# Altium PCB PCB1.PcbDoc (part 1 of 2)
Units mm, origin at the board's own origin, x right, y up, seen from the top; angles counter-clockwise.
Board outline 101 x 100.58 mm, 2 copper layers (Top Layer, Bottom Layer); 195 components, 8 nets, 449 pads, 0 vias.
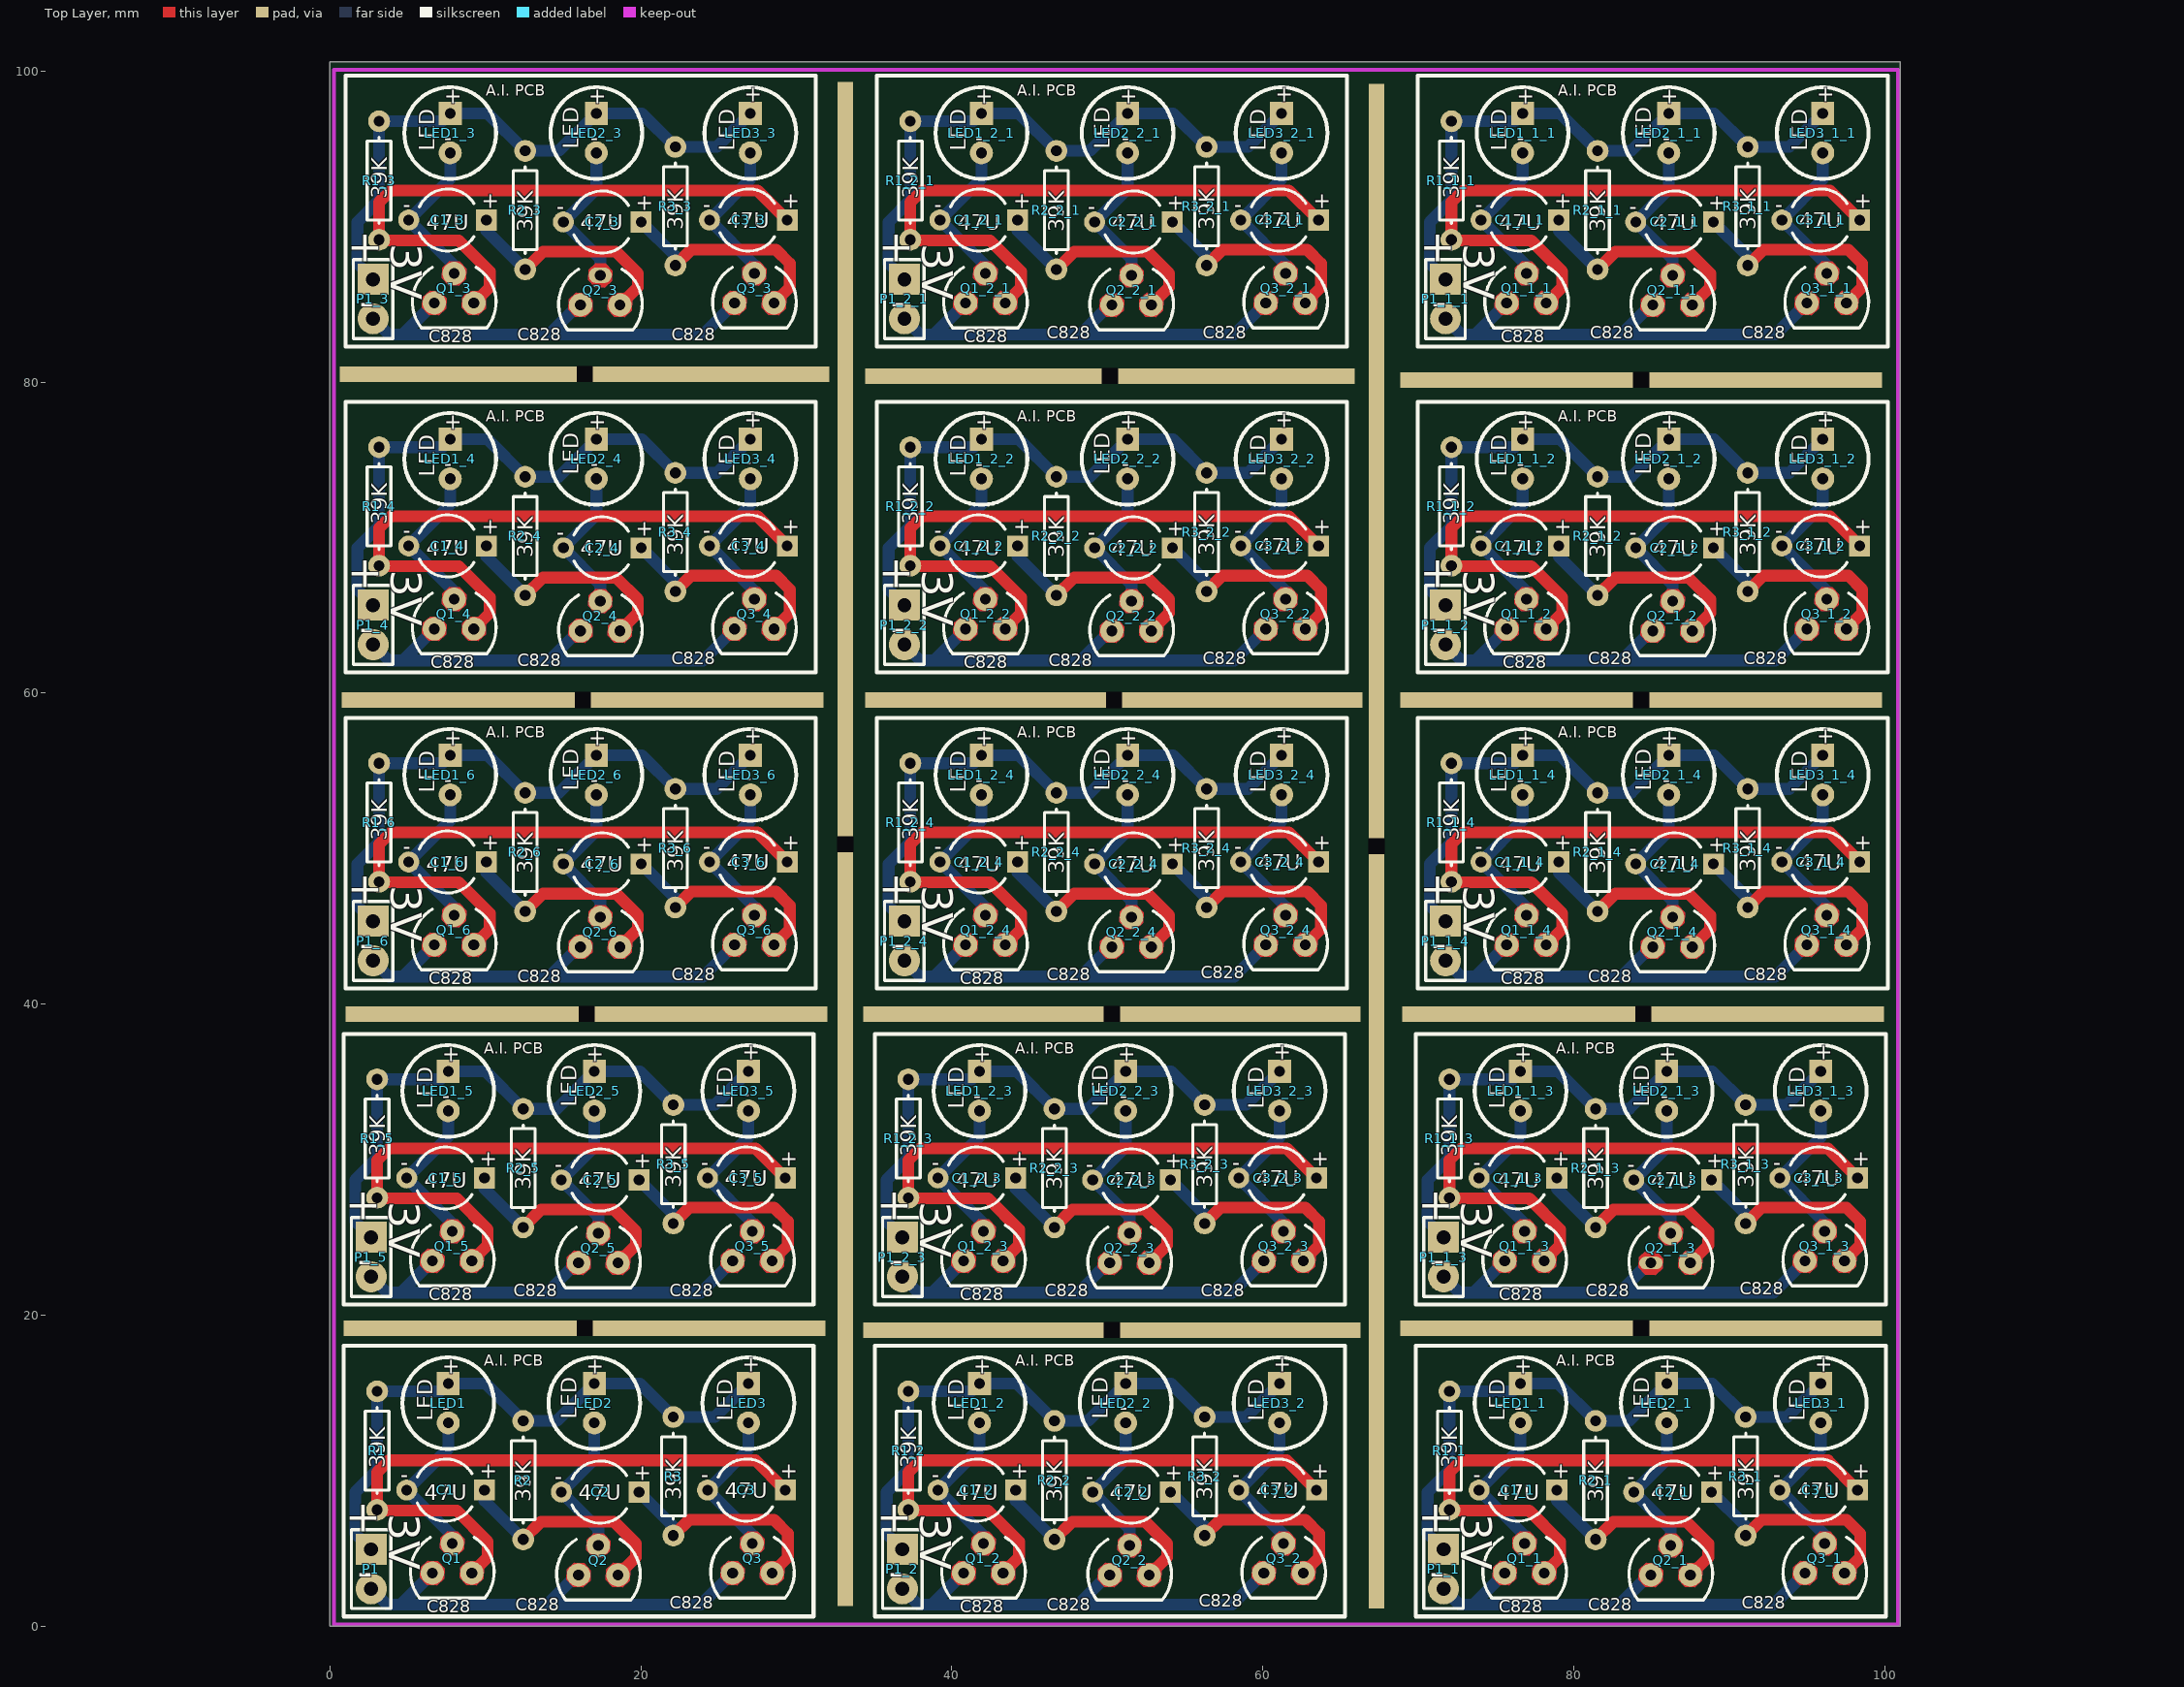
[diagram p0: Top Layer view]
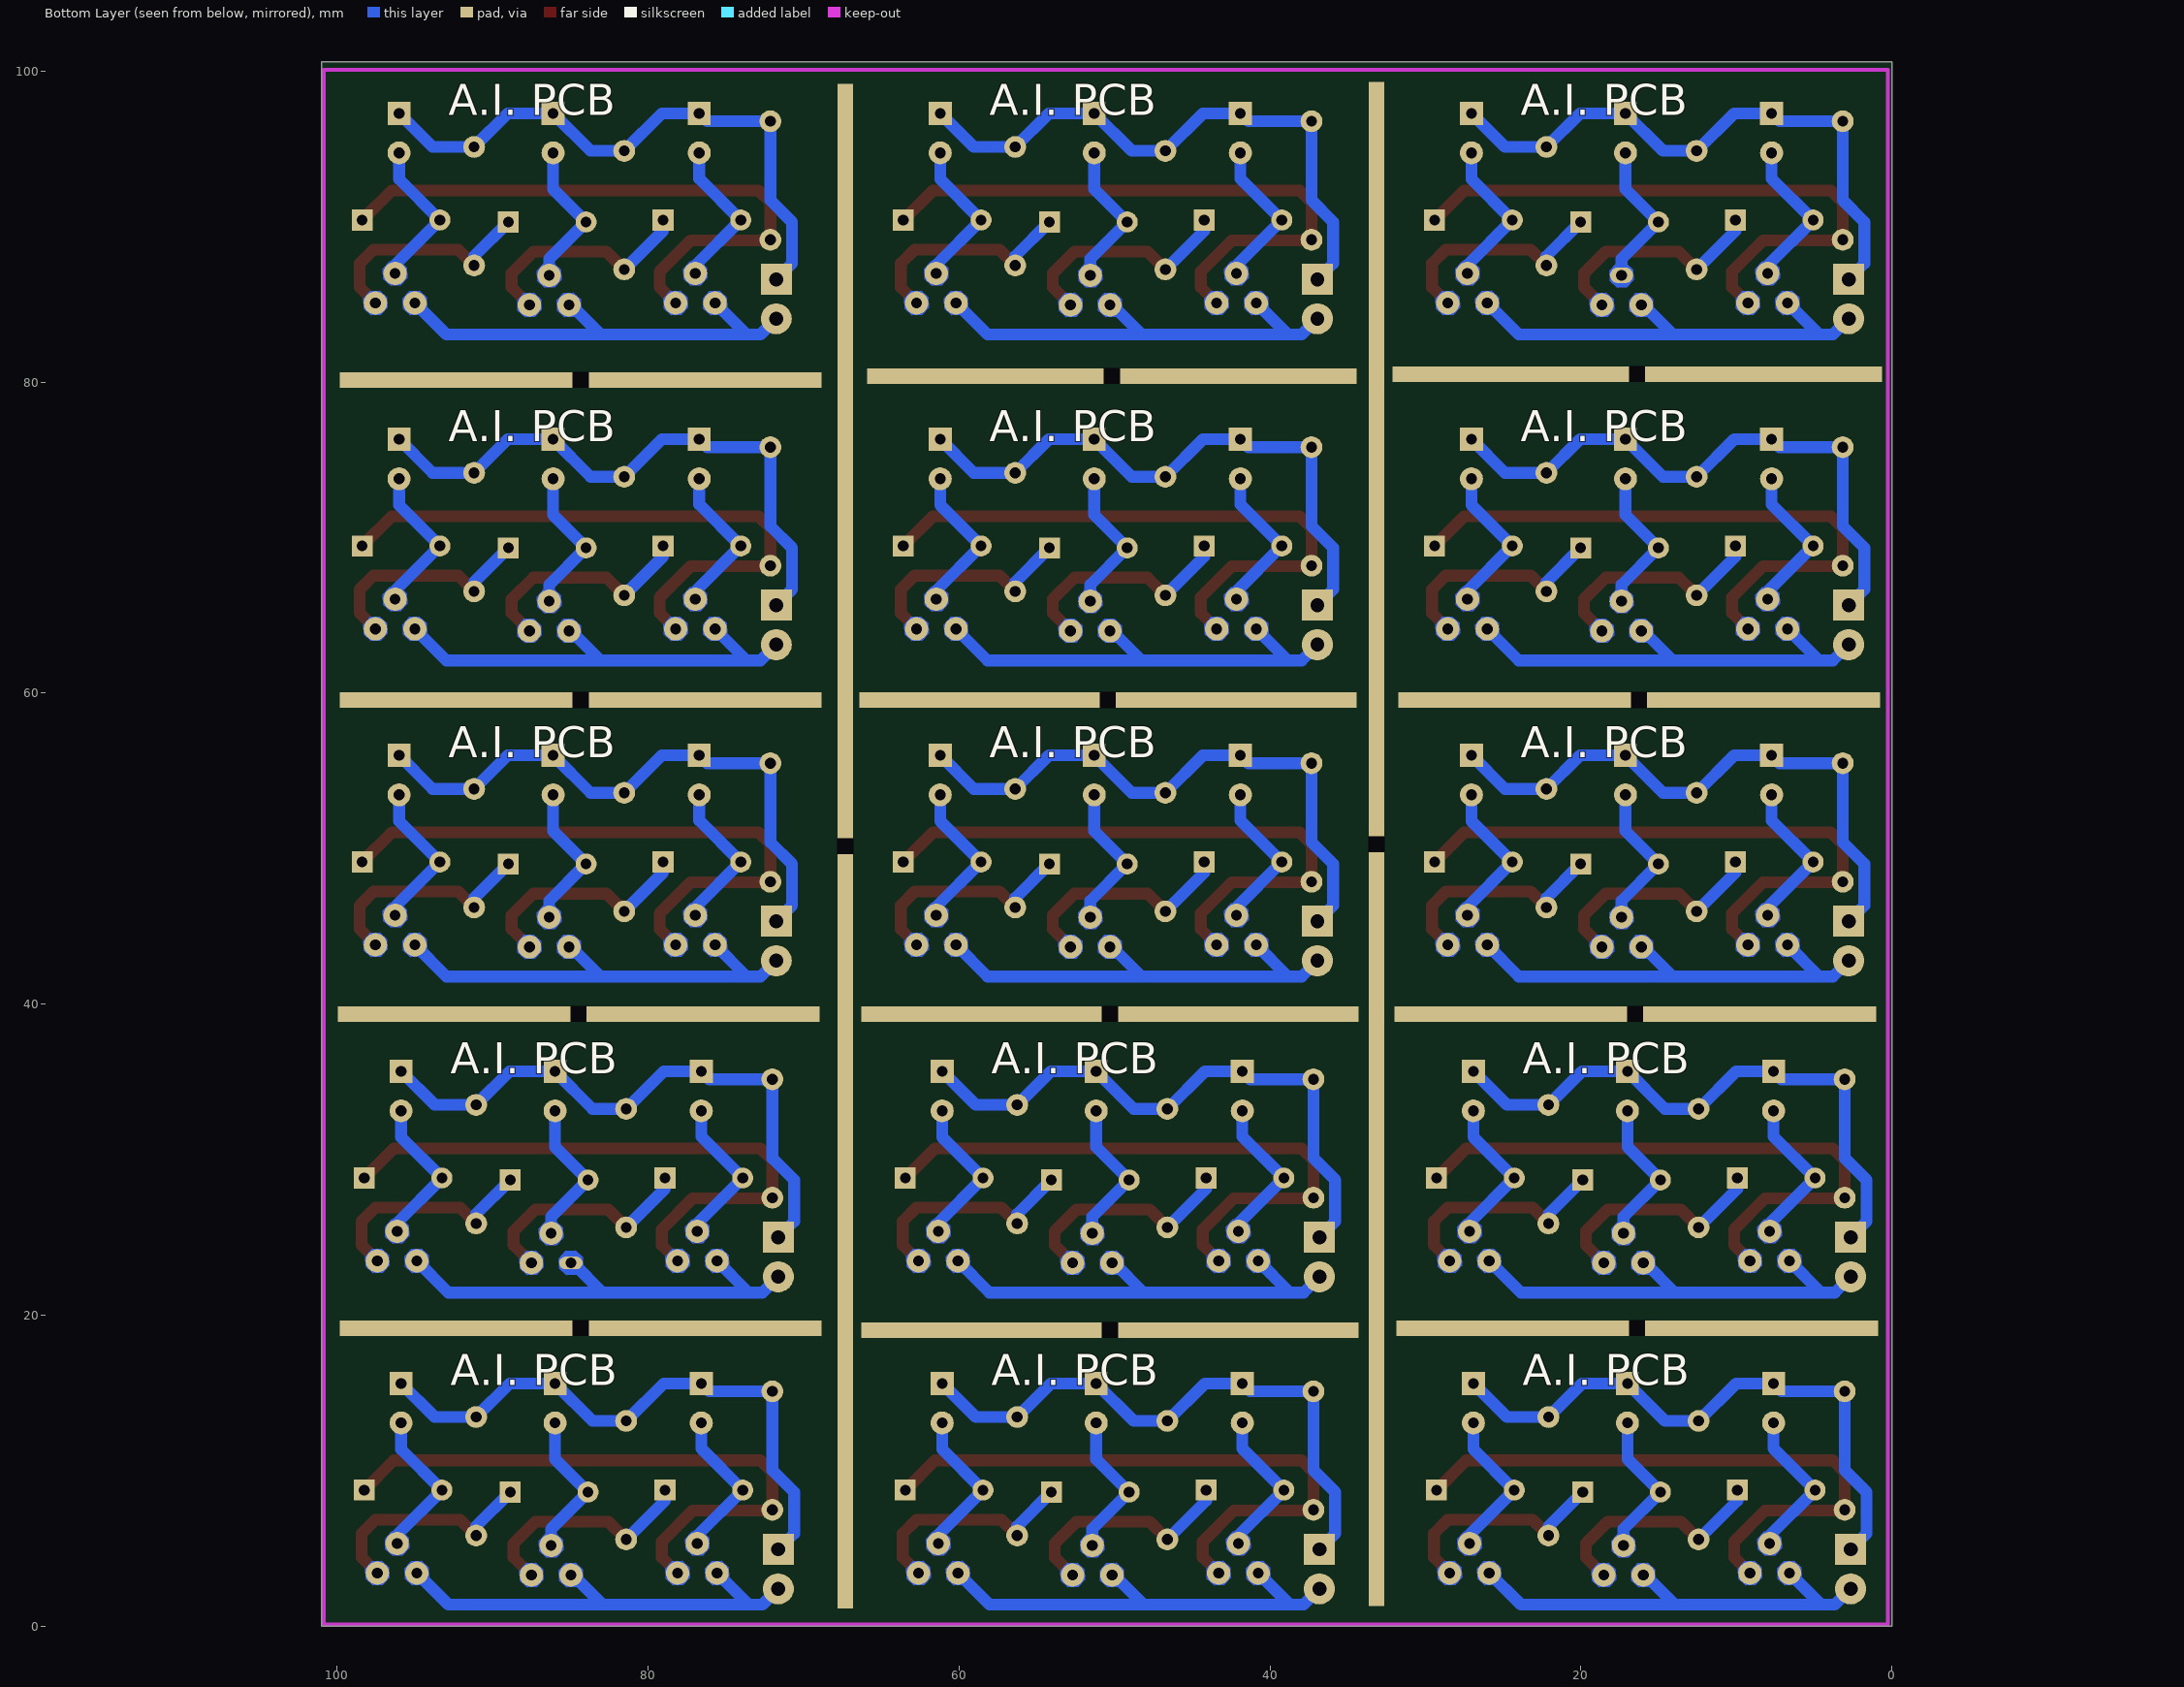
[diagram p1: Bottom Layer view, seen from below]

## Layer stack, top to bottom
Top Solder: solder mask 0.0102, Solder Resist, Dk 3.5
Top Layer: signal copper 0.0356
Dielectric 1: dielectric 0.32, FR-4, Dk 4.8
Bottom Layer: signal copper 0.0356
Bottom Solder: solder mask 0.0102, Solder Resist, Dk 3.5

## Board outline
0,0 0,100.584 101,100.584 101,0

## Design rules (kind name [scope] priority, off if disabled: settings)
Clearance [All] p1: gap=0.254 ignorepadtopadclearanceinfootprint=FALSE except(0: Arc-Hole Track-Hole SMDPad-Hole THPad-Hole Via-Hole Fill-Hole Poly-Hole Region-Hole Text-Hole)
PolygonConnect [All] p1: connectstyle=Relief reliefconductorwidth=0.254 reliefentries=4 polygonreliefangle="90 Angle" airgapwidth=0.254
RoutingVias [All] p1: holewidth=0.711 width=1.27 viastyle="Through Hole" minholewidth=0.711 minwidth=1.27 maxholewidth=0.711 maxwidth=1.27
SolderMaskExpansion [All] p1: expansion=0.102
Width [All] p1: maxlimit=0.762 minlimit=0.508 preferedwidth=0.762
30 further rules are at their usual default settings.

## Classes and differential pairs
component class Sheet1: C1 C2 C3 LED1 LED2 LED3 P1 Q1 Q2 Q3 R1 R2 R3

## Components (designator, comment, footprint, x,y, rotation, side; value= is the part's Value field where it differs from the comment)
C1 "Cap2" CAPR5-4X5 7.445,8.763 r180 top value=100pF
C1_1 "Cap2" CAPR5-4X5 76.406,8.763 r180 top value=100pF (schematic designator C1)
C1_1_1 "Cap2" CAPR5-4X5 76.533,90.424 r180 top value=100pF (schematic designator C1)
C1_1_2 "Cap2" CAPR5-4X5 76.533,69.469 r180 top value=100pF (schematic designator C1)
C1_1_3 "Cap2" CAPR5-4X5 76.406,28.829 r180 top value=100pF (schematic designator C1)
C1_1_4 "Cap2" CAPR5-4X5 76.533,49.149 r180 top value=100pF (schematic designator C1)
C1_2 "Cap2" CAPR5-4X5 41.608,8.763 r180 top value=100pF (schematic designator C1)
C1_2_1 "Cap2" CAPR5-4X5 41.735,90.424 r180 top value=100pF (schematic designator C1)
C1_2_2 "Cap2" CAPR5-4X5 41.735,69.469 r180 top value=100pF (schematic designator C1)
C1_2_3 "Cap2" CAPR5-4X5 41.608,28.829 r180 top value=100pF (schematic designator C1)
C1_2_4 "Cap2" CAPR5-4X5 41.735,49.149 r180 top value=100pF (schematic designator C1)
C1_3 "Cap2" CAPR5-4X5 7.572,90.424 r180 top value=100pF (schematic designator C1)
C1_4 "Cap2" CAPR5-4X5 7.572,69.469 r180 top value=100pF (schematic designator C1)
C1_5 "Cap2" CAPR5-4X5 7.445,28.829 r180 top value=100pF (schematic designator C1)
C1_6 "Cap2" CAPR5-4X5 7.572,49.149 r180 top value=100pF (schematic designator C1)
C2 "Cap2" CAPR5-4X5 17.391,8.636 r180 top value=100pF
C2_1 "Cap2" CAPR5-4X5 86.352,8.636 r180 top value=100pF (schematic designator C2)
C2_1_1 "Cap2" CAPR5-4X5 86.479,90.297 r180 top value=100pF (schematic designator C2)
C2_1_2 "Cap2" CAPR5-4X5 86.479,69.342 r180 top value=100pF (schematic designator C2)
C2_1_3 "Cap2" CAPR5-4X5 86.352,28.702 r180 top value=100pF (schematic designator C2)
C2_1_4 "Cap2" CAPR5-4X5 86.479,49.022 r180 top value=100pF (schematic designator C2)
C2_2 "Cap2" CAPR5-4X5 51.554,8.636 r180 top value=100pF (schematic designator C2)
C2_2_1 "Cap2" CAPR5-4X5 51.681,90.297 r180 top value=100pF (schematic designator C2)
C2_2_2 "Cap2" CAPR5-4X5 51.681,69.342 r180 top value=100pF (schematic designator C2)
C2_2_3 "Cap2" CAPR5-4X5 51.554,28.702 r180 top value=100pF (schematic designator C2)
C2_2_4 "Cap2" CAPR5-4X5 51.681,49.022 r180 top value=100pF (schematic designator C2)
C2_3 "Cap2" CAPR5-4X5 17.518,90.297 r180 top value=100pF (schematic designator C2)
C2_4 "Cap2" CAPR5-4X5 17.518,69.342 r180 top value=100pF (schematic designator C2)
C2_5 "Cap2" CAPR5-4X5 17.391,28.702 r180 top value=100pF (schematic designator C2)
C2_6 "Cap2" CAPR5-4X5 17.518,49.022 r180 top value=100pF (schematic designator C2)
C3 "Cap2" CAPR5-4X5 26.789,8.763 r180 top value=100pF
C3_1 "Cap2" CAPR5-4X5 95.75,8.763 r180 top value=100pF (schematic designator C3)
C3_1_1 "Cap2" CAPR5-4X5 95.877,90.424 r180 top value=100pF (schematic designator C3)
C3_1_2 "Cap2" CAPR5-4X5 95.877,69.469 r180 top value=100pF (schematic designator C3)
C3_1_3 "Cap2" CAPR5-4X5 95.75,28.829 r180 top value=100pF (schematic designator C3)
C3_1_4 "Cap2" CAPR5-4X5 95.877,49.149 r180 top value=100pF (schematic designator C3)
C3_2 "Cap2" CAPR5-4X5 60.952,8.763 r180 top value=100pF (schematic designator C3)
C3_2_1 "Cap2" CAPR5-4X5 61.079,90.424 r180 top value=100pF (schematic designator C3)
C3_2_2 "Cap2" CAPR5-4X5 61.079,69.469 r180 top value=100pF (schematic designator C3)
C3_2_3 "Cap2" CAPR5-4X5 60.952,28.829 r180 top value=100pF (schematic designator C3)
C3_2_4 "Cap2" CAPR5-4X5 61.079,49.149 r180 top value=100pF (schematic designator C3)
C3_3 "Cap2" CAPR5-4X5 26.916,90.424 r180 top value=100pF (schematic designator C3)
C3_4 "Cap2" CAPR5-4X5 26.916,69.469 r180 top value=100pF (schematic designator C3)
C3_5 "Cap2" CAPR5-4X5 26.789,28.829 r180 top value=100pF (schematic designator C3)
C3_6 "Cap2" CAPR5-4X5 26.916,49.149 r180 top value=100pF (schematic designator C3)
LED1 "L-53GD" L-53GD 7.612,14.351 r270 top
LED1_1 "L-53GD" L-53GD 76.573,14.351 r270 top (schematic designator LED1)
LED1_1_1 "L-53GD" L-53GD 76.7,96.012 r270 top (schematic designator LED1)
LED1_1_2 "L-53GD" L-53GD 76.7,75.057 r270 top (schematic designator LED1)
LED1_1_3 "L-53GD" L-53GD 76.573,34.417 r270 top (schematic designator LED1)
LED1_1_4 "L-53GD" L-53GD 76.7,54.737 r270 top (schematic designator LED1)
LED1_2 "L-53GD" L-53GD 41.775,14.351 r270 top (schematic designator LED1)
LED1_2_1 "L-53GD" L-53GD 41.902,96.012 r270 top (schematic designator LED1)
LED1_2_2 "L-53GD" L-53GD 41.902,75.057 r270 top (schematic designator LED1)
LED1_2_3 "L-53GD" L-53GD 41.775,34.417 r270 top (schematic designator LED1)
LED1_2_4 "L-53GD" L-53GD 41.902,54.737 r270 top (schematic designator LED1)
LED1_3 "L-53GD" L-53GD 7.739,96.012 r270 top (schematic designator LED1)
LED1_4 "L-53GD" L-53GD 7.739,75.057 r270 top (schematic designator LED1)
LED1_5 "L-53GD" L-53GD 7.612,34.417 r270 top (schematic designator LED1)
LED1_6 "L-53GD" L-53GD 7.739,54.737 r270 top (schematic designator LED1)
LED2 "L-53GD" L-53GD 17.01,14.351 r270 top
LED2_1 "L-53GD" L-53GD 85.971,14.351 r270 top (schematic designator LED2)
LED2_1_1 "L-53GD" L-53GD 86.098,96.012 r270 top (schematic designator LED2)
LED2_1_2 "L-53GD" L-53GD 86.098,75.057 r270 top (schematic designator LED2)
LED2_1_3 "L-53GD" L-53GD 85.971,34.417 r270 top (schematic designator LED2)
LED2_1_4 "L-53GD" L-53GD 86.098,54.737 r270 top (schematic designator LED2)
LED2_2 "L-53GD" L-53GD 51.173,14.351 r270 top (schematic designator LED2)
LED2_2_1 "L-53GD" L-53GD 51.3,96.012 r270 top (schematic designator LED2)
LED2_2_2 "L-53GD" L-53GD 51.3,75.057 r270 top (schematic designator LED2)
LED2_2_3 "L-53GD" L-53GD 51.173,34.417 r270 top (schematic designator LED2)
LED2_2_4 "L-53GD" L-53GD 51.3,54.737 r270 top (schematic designator LED2)
LED2_3 "L-53GD" L-53GD 17.137,96.012 r270 top (schematic designator LED2)
LED2_4 "L-53GD" L-53GD 17.137,75.057 r270 top (schematic designator LED2)
LED2_5 "L-53GD" L-53GD 17.01,34.417 r270 top (schematic designator LED2)
LED2_6 "L-53GD" L-53GD 17.137,54.737 r270 top (schematic designator LED2)
LED3 "L-53GD" L-53GD 26.916,14.351 r270 top
LED3_1 "L-53GD" L-53GD 95.877,14.351 r270 top (schematic designator LED3)
LED3_1_1 "L-53GD" L-53GD 96.004,96.012 r270 top (schematic designator LED3)
LED3_1_2 "L-53GD" L-53GD 96.004,75.057 r270 top (schematic designator LED3)
LED3_1_3 "L-53GD" L-53GD 95.877,34.417 r270 top (schematic designator LED3)
LED3_1_4 "L-53GD" L-53GD 96.004,54.737 r270 top (schematic designator LED3)
LED3_2 "L-53GD" L-53GD 61.079,14.351 r270 top (schematic designator LED3)
LED3_2_1 "L-53GD" L-53GD 61.206,96.012 r270 top (schematic designator LED3)
LED3_2_2 "L-53GD" L-53GD 61.206,75.057 r270 top (schematic designator LED3)
LED3_2_3 "L-53GD" L-53GD 61.079,34.417 r270 top (schematic designator LED3)
LED3_2_4 "L-53GD" L-53GD 61.206,54.737 r270 top (schematic designator LED3)
LED3_3 "L-53GD" L-53GD 27.043,96.012 r270 top (schematic designator LED3)
LED3_4 "L-53GD" L-53GD 27.043,75.057 r270 top (schematic designator LED3)
LED3_5 "L-53GD" L-53GD 26.916,34.417 r270 top (schematic designator LED3)
LED3_6 "L-53GD" L-53GD 27.043,54.737 r270 top (schematic designator LED3)
P1 "Header 2" HDR1X2 2.659,4.953 r270 top
P1_1 "Header 2" HDR1X2 71.62,4.953 r270 top (schematic designator P1)
P1_1_1 "Header 2" HDR1X2 71.747,86.614 r270 top (schematic designator P1)
P1_1_2 "Header 2" HDR1X2 71.747,65.659 r270 top (schematic designator P1)
P1_1_3 "Header 2" HDR1X2 71.62,25.019 r270 top (schematic designator P1)
P1_1_4 "Header 2" HDR1X2 71.747,45.339 r270 top (schematic designator P1)
P1_2 "Header 2" HDR1X2 36.822,4.953 r270 top (schematic designator P1)
P1_2_1 "Header 2" HDR1X2 36.949,86.614 r270 top (schematic designator P1)
P1_2_2 "Header 2" HDR1X2 36.949,65.659 r270 top (schematic designator P1)
P1_2_3 "Header 2" HDR1X2 36.822,25.019 r270 top (schematic designator P1)
P1_2_4 "Header 2" HDR1X2 36.949,45.339 r270 top (schematic designator P1)
P1_3 "Header 2" HDR1X2 2.786,86.614 r270 top (schematic designator P1)
P1_4 "Header 2" HDR1X2 2.786,65.659 r270 top (schematic designator P1)
P1_5 "Header 2" HDR1X2 2.659,25.019 r270 top (schematic designator P1)
P1_6 "Header 2" HDR1X2 2.786,45.339 r270 top (schematic designator P1)
Q1 "P2N2222A" *TO92#1 7.866,3.429 r0 top
Q1_1 "P2N2222A" *TO92#1 76.827,3.429 r0 top (schematic designator Q1)
Q1_1_1 "P2N2222A" *TO92#1 76.954,85.09 r0 top (schematic designator Q1)
Q1_1_2 "P2N2222A" *TO92#1 76.954,64.135 r0 top (schematic designator Q1)
Q1_1_3 "P2N2222A" *TO92#1 76.827,23.495 r0 top (schematic designator Q1)
Q1_1_4 "P2N2222A" *TO92#1 76.954,43.815 r0 top (schematic designator Q1)
Q1_2 "P2N2222A" *TO92#1 42.029,3.429 r0 top (schematic designator Q1)
Q1_2_1 "P2N2222A" *TO92#1 42.156,85.09 r0 top (schematic designator Q1)
Q1_2_2 "P2N2222A" *TO92#1 42.156,64.135 r0 top (schematic designator Q1)
Q1_2_3 "P2N2222A" *TO92#1 42.029,23.495 r0 top (schematic designator Q1)
Q1_2_4 "P2N2222A" *TO92#1 42.156,43.815 r0 top (schematic designator Q1)
Q1_3 "P2N2222A" *TO92#1 7.993,85.09 r0 top (schematic designator Q1)
Q1_4 "P2N2222A" *TO92#1 7.993,64.135 r0 top (schematic designator Q1)
Q1_5 "P2N2222A" *TO92#1 7.866,23.495 r0 top (schematic designator Q1)
Q1_6 "P2N2222A" *TO92#1 7.993,43.815 r0 top (schematic designator Q1)
Q2 "P2N2222A" *TO92#1 17.264,3.302 r0 top
Q2_1 "P2N2222A" *TO92#1 86.225,3.302 r0 top (schematic designator Q2)
Q2_1_1 "P2N2222A" *TO92#1 86.352,84.963 r0 top (schematic designator Q2)
Q2_1_2 "P2N2222A" *TO92#1 86.352,64.008 r0 top (schematic designator Q2)
Q2_1_3 "P2N2222A" *TO92#2 86.225,23.368 r0 top (schematic designator Q2)
Q2_1_4 "P2N2222A" *TO92#1 86.352,43.688 r0 top (schematic designator Q2)
Q2_2 "P2N2222A" *TO92#1 51.427,3.302 r0 top (schematic designator Q2)
Q2_2_1 "P2N2222A" *TO92#1 51.554,84.963 r0 top (schematic designator Q2)
Q2_2_2 "P2N2222A" *TO92#1 51.554,64.008 r0 top (schematic designator Q2)
Q2_2_3 "P2N2222A" *TO92#1 51.427,23.368 r0 top (schematic designator Q2)
Q2_2_4 "P2N2222A" *TO92#1 51.554,43.688 r0 top (schematic designator Q2)
Q2_3 "P2N2222A" *TO92#3 17.391,84.963 r0 top (schematic designator Q2)
Q2_4 "P2N2222A" *TO92#1 17.391,64.008 r0 top (schematic designator Q2)
Q2_5 "P2N2222A" *TO92#1 17.264,23.368 r0 top (schematic designator Q2)
Q2_6 "P2N2222A" *TO92#1 17.391,43.688 r0 top (schematic designator Q2)
Q3 "P2N2222A" *TO92#1 27.17,3.429 r0 top
Q3_1 "P2N2222A" *TO92#1 96.131,3.429 r0 top (schematic designator Q3)
Q3_1_1 "P2N2222A" *TO92#1 96.258,85.09 r0 top (schematic designator Q3)
Q3_1_2 "P2N2222A" *TO92#1 96.258,64.135 r0 top (schematic designator Q3)
Q3_1_3 "P2N2222A" *TO92#1 96.131,23.495 r0 top (schematic designator Q3)
Q3_1_4 "P2N2222A" *TO92#1 96.258,43.815 r0 top (schematic designator Q3)
Q3_2 "P2N2222A" *TO92#1 61.333,3.429 r0 top (schematic designator Q3)
Q3_2_1 "P2N2222A" *TO92#1 61.46,85.09 r0 top (schematic designator Q3)
Q3_2_2 "P2N2222A" *TO92#1 61.46,64.135 r0 top (schematic designator Q3)
Q3_2_3 "P2N2222A" *TO92#1 61.333,23.495 r0 top (schematic designator Q3)
Q3_2_4 "P2N2222A" *TO92#1 61.46,43.815 r0 top (schematic designator Q3)
Q3_3 "P2N2222A" *TO92#1 27.297,85.09 r0 top (schematic designator Q3)
Q3_4 "P2N2222A" *TO92#1 27.297,64.135 r0 top (schematic designator Q3)
Q3_5 "P2N2222A" *TO92#1 27.17,23.495 r0 top (schematic designator Q3)
Q3_6 "P2N2222A" *TO92#1 27.297,43.815 r0 top (schematic designator Q3)
R1 "Res1" AXIAL-0.3 3.04,11.303 r90 top value=1K
R1_1 "Res1" AXIAL-0.3 72.001,11.303 r90 top value=1K (schematic designator R1)
R1_1_1 "Res1" AXIAL-0.3 72.128,92.964 r90 top value=1K (schematic designator R1)
R1_1_2 "Res1" AXIAL-0.3 72.128,72.009 r90 top value=1K (schematic designator R1)
R1_1_3 "Res1" AXIAL-0.3 72.001,31.369 r90 top value=1K (schematic designator R1)
R1_1_4 "Res1" AXIAL-0.3 72.128,51.689 r90 top value=1K (schematic designator R1)
R1_2 "Res1" AXIAL-0.3 37.203,11.303 r90 top value=1K (schematic designator R1)
R1_2_1 "Res1" AXIAL-0.3 37.33,92.964 r90 top value=1K (schematic designator R1)
R1_2_2 "Res1" AXIAL-0.3 37.33,72.009 r90 top value=1K (schematic designator R1)
R1_2_3 "Res1" AXIAL-0.3 37.203,31.369 r90 top value=1K (schematic designator R1)
R1_2_4 "Res1" AXIAL-0.3 37.33,51.689 r90 top value=1K (schematic designator R1)
R1_3 "Res1" AXIAL-0.3 3.167,92.964 r90 top value=1K (schematic designator R1)
R1_4 "Res1" AXIAL-0.3 3.167,72.009 r90 top value=1K (schematic designator R1)
R1_5 "Res1" AXIAL-0.3 3.04,31.369 r90 top value=1K (schematic designator R1)
R1_6 "Res1" AXIAL-0.3 3.167,51.689 r90 top value=1K (schematic designator R1)
R2 "Res1" AXIAL-0.3 12.438,9.398 r90 top value=1K
R2_1 "Res1" AXIAL-0.3 81.399,9.398 r90 top value=1K (schematic designator R2)
R2_1_1 "Res1" AXIAL-0.3 81.526,91.059 r90 top value=1K (schematic designator R2)
R2_1_2 "Res1" AXIAL-0.3 81.526,70.104 r90 top value=1K (schematic designator R2)
R2_1_3 "Res1" AXIAL-0.3 81.399,29.464 r90 top value=1K (schematic designator R2)
R2_1_4 "Res1" AXIAL-0.3 81.526,49.784 r90 top value=1K (schematic designator R2)
R2_2 "Res1" AXIAL-0.3 46.601,9.398 r90 top value=1K (schematic designator R2)
R2_2_1 "Res1" AXIAL-0.3 46.728,91.059 r90 top value=1K (schematic designator R2)
R2_2_2 "Res1" AXIAL-0.3 46.728,70.104 r90 top value=1K (schematic designator R2)
R2_2_3 "Res1" AXIAL-0.3 46.601,29.464 r90 top value=1K (schematic designator R2)
R2_2_4 "Res1" AXIAL-0.3 46.728,49.784 r90 top value=1K (schematic designator R2)
R2_3 "Res1" AXIAL-0.3 12.565,91.059 r90 top value=1K (schematic designator R2)
R2_4 "Res1" AXIAL-0.3 12.565,70.104 r90 top value=1K (schematic designator R2)
R2_5 "Res1" AXIAL-0.3 12.438,29.464 r90 top value=1K (schematic designator R2)
R2_6 "Res1" AXIAL-0.3 12.565,49.784 r90 top value=1K (schematic designator R2)
R3 "Res1" AXIAL-0.3 22.09,9.652 r90 top value=1K
R3_1 "Res1" AXIAL-0.3 91.051,9.652 r90 top value=1K (schematic designator R3)
R3_1_1 "Res1" AXIAL-0.3 91.178,91.313 r90 top value=1K (schematic designator R3)
R3_1_2 "Res1" AXIAL-0.3 91.178,70.358 r90 top value=1K (schematic designator R3)
R3_1_3 "Res1" AXIAL-0.3 91.051,29.718 r90 top value=1K (schematic designator R3)
R3_1_4 "Res1" AXIAL-0.3 91.178,50.038 r90 top value=1K (schematic designator R3)
R3_2 "Res1" AXIAL-0.3 56.253,9.652 r90 top value=1K (schematic designator R3)
R3_2_1 "Res1" AXIAL-0.3 56.38,91.313 r90 top value=1K (schematic designator R3)
R3_2_2 "Res1" AXIAL-0.3 56.38,70.358 r90 top value=1K (schematic designator R3)
R3_2_3 "Res1" AXIAL-0.3 56.253,29.718 r90 top value=1K (schematic designator R3)
R3_2_4 "Res1" AXIAL-0.3 56.38,50.038 r90 top value=1K (schematic designator R3)
R3_3 "Res1" AXIAL-0.3 22.217,91.313 r90 top value=1K (schematic designator R3)
R3_4 "Res1" AXIAL-0.3 22.217,70.358 r90 top value=1K (schematic designator R3)
R3_5 "Res1" AXIAL-0.3 22.09,29.718 r90 top value=1K (schematic designator R3)
R3_6 "Res1" AXIAL-0.3 22.217,50.038 r90 top value=1K (schematic designator R3)

## Footprints (in the part's own frame and the unit in brackets; to place one, negate y for a bottom-side part, rotate by r counter-clockwise, add the part's x,y. Pads: shape width x height; smd on the part's side, far side on the other; paste and mask are expansions set on the pad)
*TO92#1 [mm]
  round 1.5 hole 0.7: 1(1.27,0) 2(0,1.905) 3(-1.27,0)
  Top Layer region: -0.482,0.287 -0.916,0.76 -1.557,0.788 -2.03,0.354 -2.058,-0.287 -1.624,-0.76 -0.983,-0.788 -0.51,-0.354
  Top Layer region: 0.788,2.192 0.354,2.665 -0.287,2.693 -0.76,2.259 -0.788,1.618 -0.354,1.145 0.287,1.117 0.76,1.551
  Top Layer region: 2.058,0.287 1.624,0.76 0.983,0.788 0.51,0.354 0.482,-0.287 0.916,-0.76 1.557,-0.788 2.03,-0.354
  Bottom Layer region: -0.482,0.287 -0.916,0.76 -1.557,0.788 -2.03,0.354 -2.058,-0.287 -1.624,-0.76 -0.983,-0.788 -0.51,-0.354
  Bottom Layer region: 0.788,2.192 0.354,2.665 -0.287,2.693 -0.76,2.259 -0.788,1.618 -0.354,1.145 0.287,1.117 0.76,1.551
  Bottom Layer region: 2.058,0.287 1.624,0.76 0.983,0.788 0.51,0.354 0.482,-0.287 0.916,-0.76 1.557,-0.788 2.03,-0.354
  Multi-Layer region: -0.482,0.287 -0.916,0.76 -1.557,0.788 -2.03,0.354 -2.058,-0.287 -1.624,-0.76 -0.983,-0.788 -0.51,-0.354
  Multi-Layer region: 0.788,2.192 0.354,2.665 -0.287,2.693 -0.76,2.259 -0.788,1.618 -0.354,1.145 0.287,1.117 0.76,1.551
  Multi-Layer region: 2.058,0.287 1.624,0.76 0.983,0.788 0.51,0.354 0.482,-0.287 0.916,-0.76 1.557,-0.788 2.03,-0.354
  silkscreen extent -2.68,-1.61 2.7,2.3
*TO92#2 [mm]
  round 1.5 hole 0.7: 1(1.27,0) 2(0,1.905)
  oval 1.5x0.813 hole 0.7: 3(-1.27,0)
  Top Layer region: -0.482,0.287 -0.916,0.76 -1.557,0.788 -2.03,0.354 -2.058,-0.287 -1.624,-0.76 -0.983,-0.788 -0.51,-0.354
  Top Layer region: 0.788,2.192 0.354,2.665 -0.287,2.693 -0.76,2.259 -0.788,1.618 -0.354,1.145 0.287,1.117 0.76,1.551
  Top Layer region: 2.058,0.287 1.624,0.76 0.983,0.788 0.51,0.354 0.482,-0.287 0.916,-0.76 1.557,-0.788 2.03,-0.354
  Bottom Layer region: -0.482,0.287 -0.916,0.76 -1.557,0.788 -2.03,0.354 -2.058,-0.287 -1.624,-0.76 -0.983,-0.788 -0.51,-0.354
  Bottom Layer region: 0.788,2.192 0.354,2.665 -0.287,2.693 -0.76,2.259 -0.788,1.618 -0.354,1.145 0.287,1.117 0.76,1.551
  Bottom Layer region: 2.058,0.287 1.624,0.76 0.983,0.788 0.51,0.354 0.482,-0.287 0.916,-0.76 1.557,-0.788 2.03,-0.354
  Multi-Layer region: -0.482,0.287 -0.916,0.76 -1.557,0.788 -2.03,0.354 -2.058,-0.287 -1.624,-0.76 -0.983,-0.788 -0.51,-0.354
  Multi-Layer region: 0.788,2.192 0.354,2.665 -0.287,2.693 -0.76,2.259 -0.788,1.618 -0.354,1.145 0.287,1.117 0.76,1.551
  Multi-Layer region: 2.058,0.287 1.624,0.76 0.983,0.788 0.51,0.354 0.482,-0.287 0.916,-0.76 1.557,-0.788 2.03,-0.354
  silkscreen extent -2.68,-1.61 2.7,2.3
*TO92#3 [mm]
  round 1.5 hole 0.7: 1(1.27,0) 3(-1.27,0)
  oval 1.5x1 hole 0.7: 2(0,1.905)
  Top Layer region: -0.482,0.287 -0.916,0.76 -1.557,0.788 -2.03,0.354 -2.058,-0.287 -1.624,-0.76 -0.983,-0.788 -0.51,-0.354
  Top Layer region: 0.788,2.192 0.354,2.665 -0.287,2.693 -0.76,2.259 -0.788,1.618 -0.354,1.145 0.287,1.117 0.76,1.551
  Top Layer region: 2.058,0.287 1.624,0.76 0.983,0.788 0.51,0.354 0.482,-0.287 0.916,-0.76 1.557,-0.788 2.03,-0.354
  Bottom Layer region: -0.482,0.287 -0.916,0.76 -1.557,0.788 -2.03,0.354 -2.058,-0.287 -1.624,-0.76 -0.983,-0.788 -0.51,-0.354
  Bottom Layer region: 0.788,2.192 0.354,2.665 -0.287,2.693 -0.76,2.259 -0.788,1.618 -0.354,1.145 0.287,1.117 0.76,1.551
  Bottom Layer region: 2.058,0.287 1.624,0.76 0.983,0.788 0.51,0.354 0.482,-0.287 0.916,-0.76 1.557,-0.788 2.03,-0.354
  Multi-Layer region: -0.482,0.287 -0.916,0.76 -1.557,0.788 -2.03,0.354 -2.058,-0.287 -1.624,-0.76 -0.983,-0.788 -0.51,-0.354
  Multi-Layer region: 0.788,2.192 0.354,2.665 -0.287,2.693 -0.76,2.259 -0.788,1.618 -0.354,1.145 0.287,1.117 0.76,1.551
  Multi-Layer region: 2.058,0.287 1.624,0.76 0.983,0.788 0.51,0.354 0.482,-0.287 0.916,-0.76 1.557,-0.788 2.03,-0.354
  silkscreen extent -2.68,-1.61 2.7,2.3
AXIAL-0.3 [mm] "Axial Device, Thru-Hole; 2 Leads; 0.3 in Pin Spacing"
  round 1.4 hole 0.7: 1(-3.81,0) 2(3.81,0)
  silkscreen extent -2.77,-0.76 2.77,0.76
CAPR5-4X5 [mm] "Capacitor; 2 Leads"
  rect 1.35x1.35 hole 0.7: 1(-2.5,0)
  round 1.35 hole 0.7: 2(2.5,0)
  silkscreen extent -1.69,-2 1.82,2
HDR1X2 [mm] "Connector; Header; 2 Position"
  rect 2x2 hole 0.9: 1(0,0)
  round 2 hole 0.9: 2(2.54,0)
  silkscreen extent -1.27,-1.27 3.81,1.27
L-53GD [mm]
  rect 1.48x1.48 hole 0.7: 1(-1.27,0)
  round 1.48 hole 0.7: 2(1.27,0)
  silkscreen extent -2.95,-2.95 2.95,2.95

## Part data
C1 C1_1 C1_1_1 C1_1_2 C1_1_3 C1_1_4 C1_2 C1_2_1 C1_2_2 C1_2_3 C1_2_4 C1_3 C1_4 C1_5 C1_6 C2 C2_1 C2_1_1 C2_1_2 C2_1_3 C2_1_4 C2_2 C2_2_1 C2_2_2 C2_2_3 C2_2_4 C2_3 C2_4 C2_5 C2_6 C3 C3_1 C3_1_1 C3_1_2 C3_1_3 C3_1_4 C3_2 C3_2_1 C3_2_2 C3_2_3 C3_2_4 C3_3 C3_4 C3_5 C3_6: "Capacitor", PackageDescription="Capacitor; 2 Leads", PackageReference=CAPR5-4X5, Published=23-Sep-2002, Publisher="Altium Limited"
LED1 LED1_1 LED1_1_1 LED1_1_2 LED1_1_3 LED1_1_4 LED1_2 LED1_2_1 LED1_2_2 LED1_2_3 LED1_2_4 LED1_3 LED1_4 LED1_5 LED1_6 LED2 LED2_1 LED2_1_1 LED2_1_2 LED2_1_3 LED2_1_4 LED2_2 LED2_2_1 LED2_2_2 LED2_2_3 LED2_2_4 LED2_3 LED2_4 LED2_5 LED2_6 LED3 LED3_1 LED3_1_1 LED3_1_2 LED3_1_3 LED3_1_4 LED3_2 LED3_2_1 LED3_2_2 LED3_2_3 LED3_2_4 LED3_3 LED3_4 LED3_5 LED3_6: "LED", Manufacturer_Name=Kingbright, Mouser Part Number=N/A, RS Part Number=2286004A, Allied_Number=70424261, Allied Price/Stock=http://www.alliedelec.com/kingbright-l-53gd/70424261/, Datasheet Link=http://docs-emea.rs-online.com/webdocs/151e/0900766b8151e408.pdf, Manufacturer_Part_Number=L-53GD, Mouser Price/Stock=https://www.mouser.com/Search/Refine.aspx?Keyword=N%2FA, RS Price/Stock=http://uk.rs-online.com/web/p/products/2286004A
P1 P1_1 P1_1_1 P1_1_2 P1_1_3 P1_1_4 P1_2 P1_2_1 P1_2_2 P1_2_3 P1_2_4 P1_3 P1_4 P1_5 P1_6: "Header, 2-Pin", LatestRevisionDate=17-Jul-2002, LatestRevisionNote="Re-released for DXP Platform.", Publisher="Altium Limited"
Q1 Q1_1 Q1_1_1 Q1_1_2 Q1_1_3 Q1_1_4 Q1_2 Q1_2_1 Q1_2_2 Q1_2_3 Q1_2_4 Q1_3 Q1_4 Q1_5 Q1_6 Q2 Q2_1 Q2_1_1 Q2_1_2 Q2_1_3 Q2_1_4 Q2_2 Q2_2_1 Q2_2_2 Q2_2_3 Q2_2_4 Q2_3 Q2_4 Q2_5 Q2_6 Q3 Q3_1 Q3_1_1 Q3_1_2 Q3_1_3 Q3_1_4 Q3_2 Q3_2_1 Q3_2_2 Q3_2_3 Q3_2_4 Q3_3 Q3_4 Q3_5 Q3_6: Package="TO-92 NXP Semiconductors", Availability=Unavailable, MF="ON Semiconductor", MP=P2N2222A, Price=None, SnapEDA_Link=https://www.snapeda.com/parts/P2N2222A/ON%20Semiconductor/view-part/?ref=snap
R1 R1_1 R1_1_1 R1_1_2 R1_1_3 R1_1_4 R1_2 R1_2_1 R1_2_2 R1_2_3 R1_2_4 R1_3 R1_4 R1_5 R1_6 R2 R2_1 R2_1_1 R2_1_2 R2_1_3 R2_1_4 R2_2 R2_2_1 R2_2_2 R2_2_3 R2_2_4 R2_3 R2_4 R2_5 R2_6 R3 R3_1 R3_1_1 R3_1_2 R3_1_3 R3_1_4 R3_2 R3_2_1 R3_2_2 R3_2_3 R3_2_4 R3_3 R3_4 R3_5 R3_6: "Resistor", LatestRevisionDate=17-Jul-2002, LatestRevisionNote="Re-released for DXP Platform.", PackageDescription="Axial Device, Thru-Hole; 2 Leads; 0.3 in Pin Spacing", PackageReference=AXIAL-0.3, Published=8-Jun-2000, Publisher="Altium Limited"

## Free pads (board coordinates)
  rect 1x98 hole 1 square: 4(33.147,50.292) 4(67.31,50.165)
  rect 31x1 hole 1 square: 5(16.256,59.563) 5(16.383,19.177) 5(16.51,39.37) 5(84.328,19.177) 5(84.328,59.563) 5(84.328,80.137) 5(84.455,39.37)
  rect 31.5x1 hole 1 square: 5(16.383,80.518) 5(50.165,80.391)
  rect 32x1 hole 1 square: 5(50.292,19.05) 5(50.292,39.37) 5(50.419,59.563)

## Nets (pads, with @x,y where several pads share a name; then routed paths per layer and width w, separated by ;. In a path a pad name is that pad's centre, name@x,y a point inside that pad or via, vN(x,y) a via of type N, cw(c..) or ccw(c..) an arc to the next point about the centre after c; other vN are vias at no path point)
NetC1_1: C1.1 Q2.1 R2.1 | length 15
  Top Layer w0.762: R2.1@12.438,5.588 13.581,6.731 18.28,6.731 19.677,5.334 19.677,4.445 Q2.1@18.534,3.302
  Bottom Layer w0.762: C1.1@9.945,8.763 9.945,8.081 R2.1@12.438,5.588
NetC1_2: C1.2 LED1.2 Q1.2 | length 10.1
  Bottom Layer w0.762: LED1.2@7.612,13.081 7.612,11.43 C1.2@4.945,8.763 7.866,5.842 Q1.2@7.866,5.334
NetC2_1: C2.1 Q3.1 R3.1 | length 14.8
  Top Layer w0.762: R3.1@22.09,5.842 23.106,6.858 28.567,6.858 29.456,5.969 29.456,4.445 Q3.1@28.44,3.429
  Bottom Layer w0.762: C2.1@19.891,8.636 22.09,6.437 R3.1@22.09,5.842
NetC2_2: C2.2 LED2.2 Q2.2 | length 9.7
  Bottom Layer w0.762: LED2.2@17.01,13.081 17.01,10.755 C2.2@14.891,8.636 17.264,6.263 Q2.2@17.264,5.207
NetC3_1: C3.1 Q1.1 R1.1 | length 40.2
  Top Layer w0.762: Q1.1@9.136,3.429 10.152,4.445 10.152,5.461 8.16,7.453 3.04,7.453 R1.1@3.04,7.493 3.04,9.906 3.802,10.668 27.384,10.668 C3.1@29.289,8.763
NetC3_2: C3.2 LED3.2 Q3.2 | length 10
  Bottom Layer w0.762: LED3.2@26.916,13.081 26.916,11.39 C3.2@24.289,8.763 27.17,5.882 Q3.2@27.17,5.334
NetLED1_1: LED1.1 LED2.1 LED3.1 P1.1 R1.2 R2.2 R3.2 | length 39
  Bottom Layer w0.762: P1.1@2.659,4.953 1.643,5.969 1.643,8.636 3.04,10.033 R1.2@3.04,15.113 7.104,15.113 LED1.1@7.612,15.621 10.025,15.621 R2.2@12.438,13.208 14.597,13.208 LED2.1@17.01,15.621 19.931,15.621 R3.2@22.09,13.462 24.757,13.462 LED3.1@26.916,15.621
NetP1_2: P1.2 Q1.3 Q2.3 Q3.3 | length 30.2
  Bottom Layer w0.762: P1.2@2.659,2.413 3.675,1.397 4.564,1.397 ; Q1.3@6.596,3.429 4.564,1.397 ; Q2.3@15.994,3.302 15.867,3.302 13.962,1.397 ; Q3.3@25.9,3.429 23.868,1.397 13.962,1.397 ; 4.564,1.397 13.962,1.397
pads on no net: C1_1.1 C1_1.2 C1_1_1.1 C1_1_1.2 C1_1_2.1 C1_1_2.2 C1_1_3.1 C1_1_3.2 C1_1_4.1 C1_1_4.2 C1_2.1 C1_2.2 C1_2_1.1 C1_2_1.2 C1_2_2.1 C1_2_2.2 C1_2_3.1 C1_2_3.2 C1_2_4.1 C1_2_4.2 C1_3.1 C1_3.2 C1_4.1 C1_4.2 C1_5.1 C1_5.2 C1_6.1 C1_6.2 C2_1.1 C2_1.2 C2_1_1.1 C2_1_1.2 C2_1_2.1 C2_1_2.2 C2_1_3.1 C2_1_3.2 C2_1_4.1 C2_1_4.2 C2_2.1 C2_2.2 C2_2_1.1 C2_2_1.2 C2_2_2.1 C2_2_2.2 C2_2_3.1 C2_2_3.2 C2_2_4.1 C2_2_4.2 C2_3.1 C2_3.2 C2_4.1 C2_4.2 C2_5.1 C2_5.2 C2_6.1 C2_6.2 C3_1.1 C3_1.2 C3_1_1.1 C3_1_1.2 C3_1_2.1 C3_1_2.2 C3_1_3.1 C3_1_3.2 C3_1_4.1 C3_1_4.2 C3_2.1 C3_2.2 C3_2_1.1 C3_2_1.2 C3_2_2.1 C3_2_2.2 C3_2_3.1 C3_2_3.2 C3_2_4.1 C3_2_4.2 C3_3.1 C3_3.2 C3_4.1 C3_4.2 C3_5.1 C3_5.2 C3_6.1 C3_6.2 LED1_1.1 LED1_1.2 LED1_1_1.1 LED1_1_1.2 LED1_1_2.1 LED1_1_2.2 LED1_1_3.1 LED1_1_3.2 LED1_1_4.1 LED1_1_4.2 LED1_2.1 LED1_2.2 LED1_2_1.1 LED1_2_1.2 LED1_2_2.1 LED1_2_2.2 LED1_2_3.1 LED1_2_3.2 LED1_2_4.1 LED1_2_4.2 LED1_3.1 LED1_3.2 LED1_4.1 LED1_4.2 LED1_5.1 LED1_5.2 LED1_6.1 LED1_6.2 LED2_1.1 LED2_1.2 LED2_1_1.1 LED2_1_1.2 LED2_1_2.1 LED2_1_2.2 LED2_1_3.1 LED2_1_3.2 LED2_1_4.1 LED2_1_4.2 LED2_2.1 LED2_2.2 LED2_2_1.1 LED2_2_1.2 LED2_2_2.1 LED2_2_2.2 LED2_2_3.1 LED2_2_3.2 LED2_2_4.1 LED2_2_4.2 LED2_3.1 LED2_3.2 LED2_4.1 LED2_4.2 LED2_5.1 LED2_5.2 LED2_6.1 LED2_6.2 LED3_1.1 LED3_1.2 LED3_1_1.1 LED3_1_1.2 LED3_1_2.1 LED3_1_2.2 LED3_1_3.1 LED3_1_3.2 LED3_1_4.1 LED3_1_4.2 LED3_2.1 LED3_2.2 LED3_2_1.1 LED3_2_1.2 LED3_2_2.1 LED3_2_2.2 LED3_2_3.1 LED3_2_3.2 LED3_2_4.1 LED3_2_4.2 LED3_3.1 LED3_3.2 LED3_4.1 LED3_4.2 LED3_5.1 LED3_5.2 LED3_6.1 LED3_6.2 P1_1.1 P1_1.2 P1_1_1.1 P1_1_1.2 P1_1_2.1 P1_1_2.2 P1_1_3.1 P1_1_3.2 P1_1_4.1 P1_1_4.2 P1_2.1 P1_2.2 P1_2_1.1 P1_2_1.2 P1_2_2.1 P1_2_2.2 P1_2_3.1 P1_2_3.2 P1_2_4.1 P1_2_4.2 P1_3.1 P1_3.2 P1_4.1 P1_4.2 P1_5.1 P1_5.2 P1_6.1 P1_6.2 Q1_1.1 Q1_1.2 Q1_1.3 Q1_1_1.1 Q1_1_1.2 Q1_1_1.3 Q1_1_2.1 Q1_1_2.2 Q1_1_2.3 Q1_1_3.1 Q1_1_3.2 Q1_1_3.3 Q1_1_4.1 Q1_1_4.2 Q1_1_4.3 Q1_2.1 Q1_2.2 Q1_2.3 Q1_2_1.1 Q1_2_1.2 Q1_2_1.3 Q1_2_2.1 Q1_2_2.2 Q1_2_2.3 Q1_2_3.1 Q1_2_3.2 Q1_2_3.3 Q1_2_4.1 Q1_2_4.2 Q1_2_4.3 Q1_3.1 Q1_3.2 Q1_3.3 Q1_4.1 Q1_4.2 Q1_4.3 Q1_5.1 Q1_5.2 Q1_5.3 Q1_6.1 Q1_6.2 Q1_6.3 Q2_1.1 Q2_1.2 Q2_1.3 Q2_1_1.1 Q2_1_1.2 Q2_1_1.3 Q2_1_2.1 Q2_1_2.2 Q2_1_2.3 Q2_1_3.1 Q2_1_3.2 Q2_1_3.3 Q2_1_4.1 Q2_1_4.2 Q2_1_4.3 Q2_2.1 Q2_2.2 Q2_2.3 Q2_2_1.1 Q2_2_1.2 Q2_2_1.3 Q2_2_2.1 Q2_2_2.2 Q2_2_2.3 Q2_2_3.1 Q2_2_3.2 Q2_2_3.3 Q2_2_4.1 Q2_2_4.2 Q2_2_4.3 Q2_3.1 Q2_3.2 Q2_3.3 Q2_4.1 Q2_4.2 Q2_4.3 Q2_5.1 Q2_5.2 Q2_5.3 Q2_6.1 Q2_6.2 Q2_6.3 Q3_1.1 Q3_1.2 Q3_1.3 Q3_1_1.1 Q3_1_1.2 Q3_1_1.3 Q3_1_2.1 Q3_1_2.2 Q3_1_2.3 Q3_1_3.1 Q3_1_3.2 Q3_1_3.3 Q3_1_4.1 Q3_1_4.2 Q3_1_4.3 Q3_2.1 Q3_2.2 Q3_2.3 Q3_2_1.1 Q3_2_1.2 Q3_2_1.3 Q3_2_2.1 Q3_2_2.2 Q3_2_2.3 Q3_2_3.1 Q3_2_3.2 Q3_2_3.3 Q3_2_4.1 Q3_2_4.2 Q3_2_4.3 Q3_3.1 Q3_3.2 Q3_3.3 Q3_4.1 Q3_4.2 Q3_4.3 Q3_5.1 Q3_5.2 Q3_5.3 Q3_6.1 Q3_6.2 Q3_6.3 R1_1.1 R1_1.2 R1_1_1.1 R1_1_1.2 R1_1_2.1 R1_1_2.2 R1_1_3.1 R1_1_3.2 R1_1_4.1 R1_1_4.2 R1_2.1 R1_2.2 R1_2_1.1 R1_2_1.2 R1_2_2.1 R1_2_2.2 R1_2_3.1 R1_2_3.2 R1_2_4.1 R1_2_4.2 R1_3.1 R1_3.2 R1_4.1 R1_4.2 R1_5.1 R1_5.2 R1_6.1 R1_6.2 R2_1.1 R2_1.2 R2_1_1.1 R2_1_1.2 R2_1_2.1 R2_1_2.2 R2_1_3.1 R2_1_3.2 R2_1_4.1 R2_1_4.2 R2_2.1 R2_2.2 R2_2_1.1 R2_2_1.2 R2_2_2.1 R2_2_2.2 R2_2_3.1 R2_2_3.2 R2_2_4.1 R2_2_4.2 R2_3.1 R2_3.2 R2_4.1 R2_4.2 R2_5.1 R2_5.2 R2_6.1 R2_6.2 R3_1.1 R3_1.2 R3_1_1.1 R3_1_1.2 R3_1_2.1 R3_1_2.2 R3_1_3.1 R3_1_3.2 R3_1_4.1 R3_1_4.2 R3_2.1 R3_2.2 R3_2_1.1 R3_2_1.2 R3_2_2.1 R3_2_2.2 R3_2_3.1 R3_2_3.2 R3_2_4.1 R3_2_4.2 R3_3.1 R3_3.2 R3_4.1 R3_4.2 R3_5.1 R3_5.2 R3_6.1 R3_6.2